# Altium PCB LaunchyRIO-NoPour.PcbDoc
Units mil, origin at the board's own origin, x right, y up, seen from the top; angles counter-clockwise.
Board outline 3400 x 3170 mil, 4 copper layers (Top, GND, 3V3, Bottom), stack 33.234 mil thick; 82 components, 98 nets, 408 pads, 108 vias.
Unrouted connection lines stored in the file: 58.
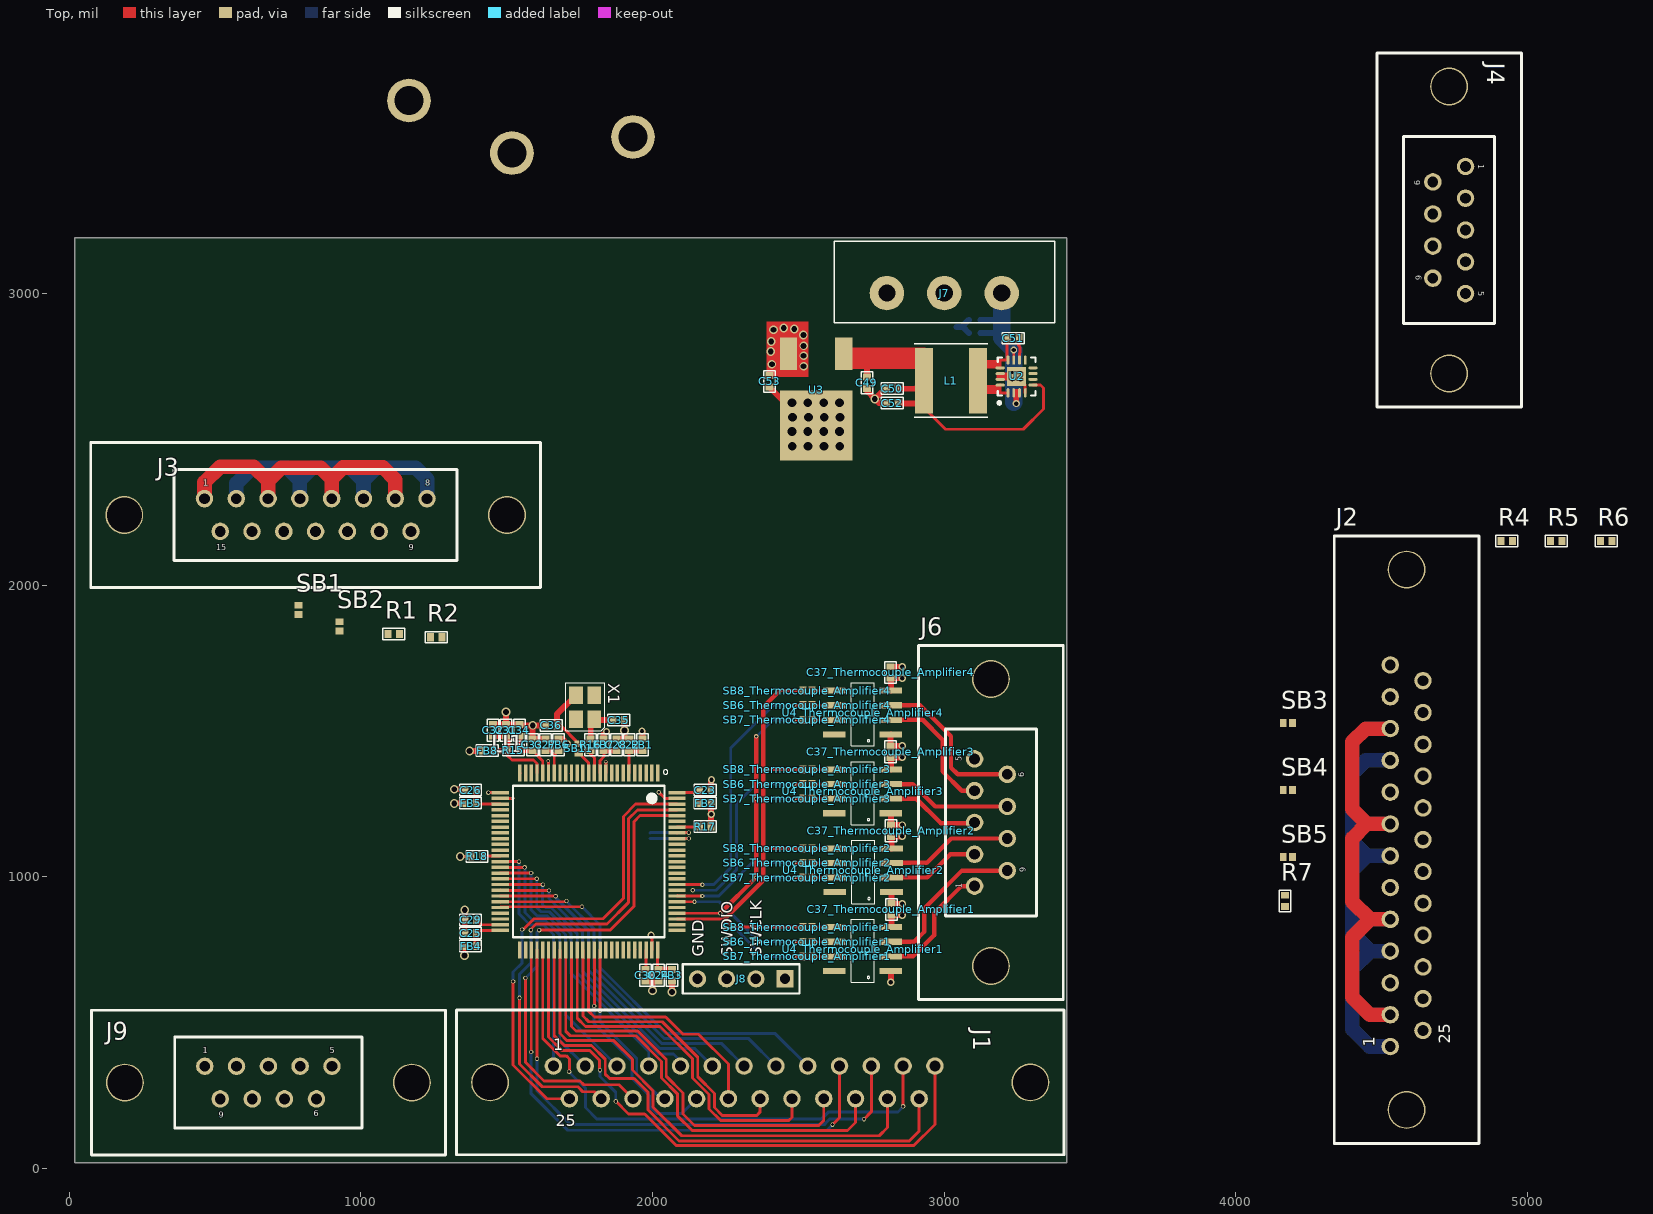
[diagram p0: Top view]
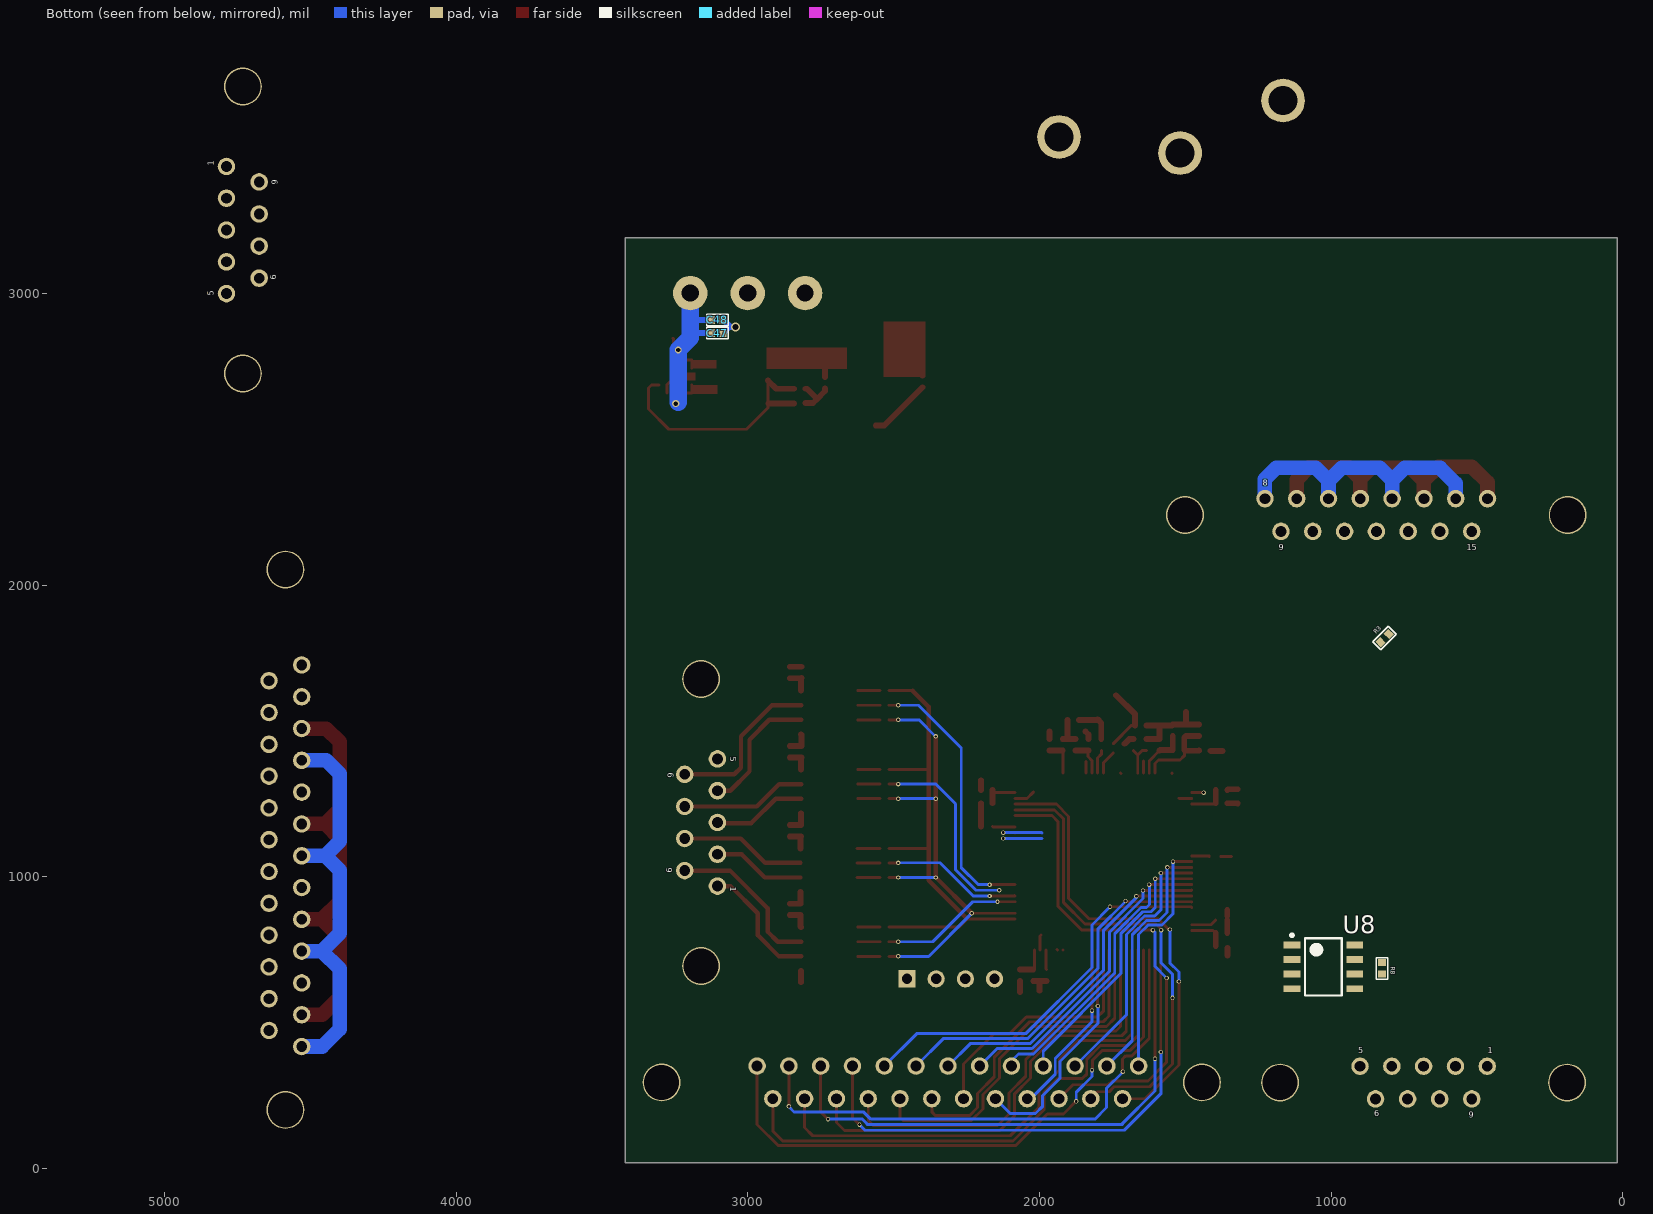
[diagram p1: Bottom view, seen from below]
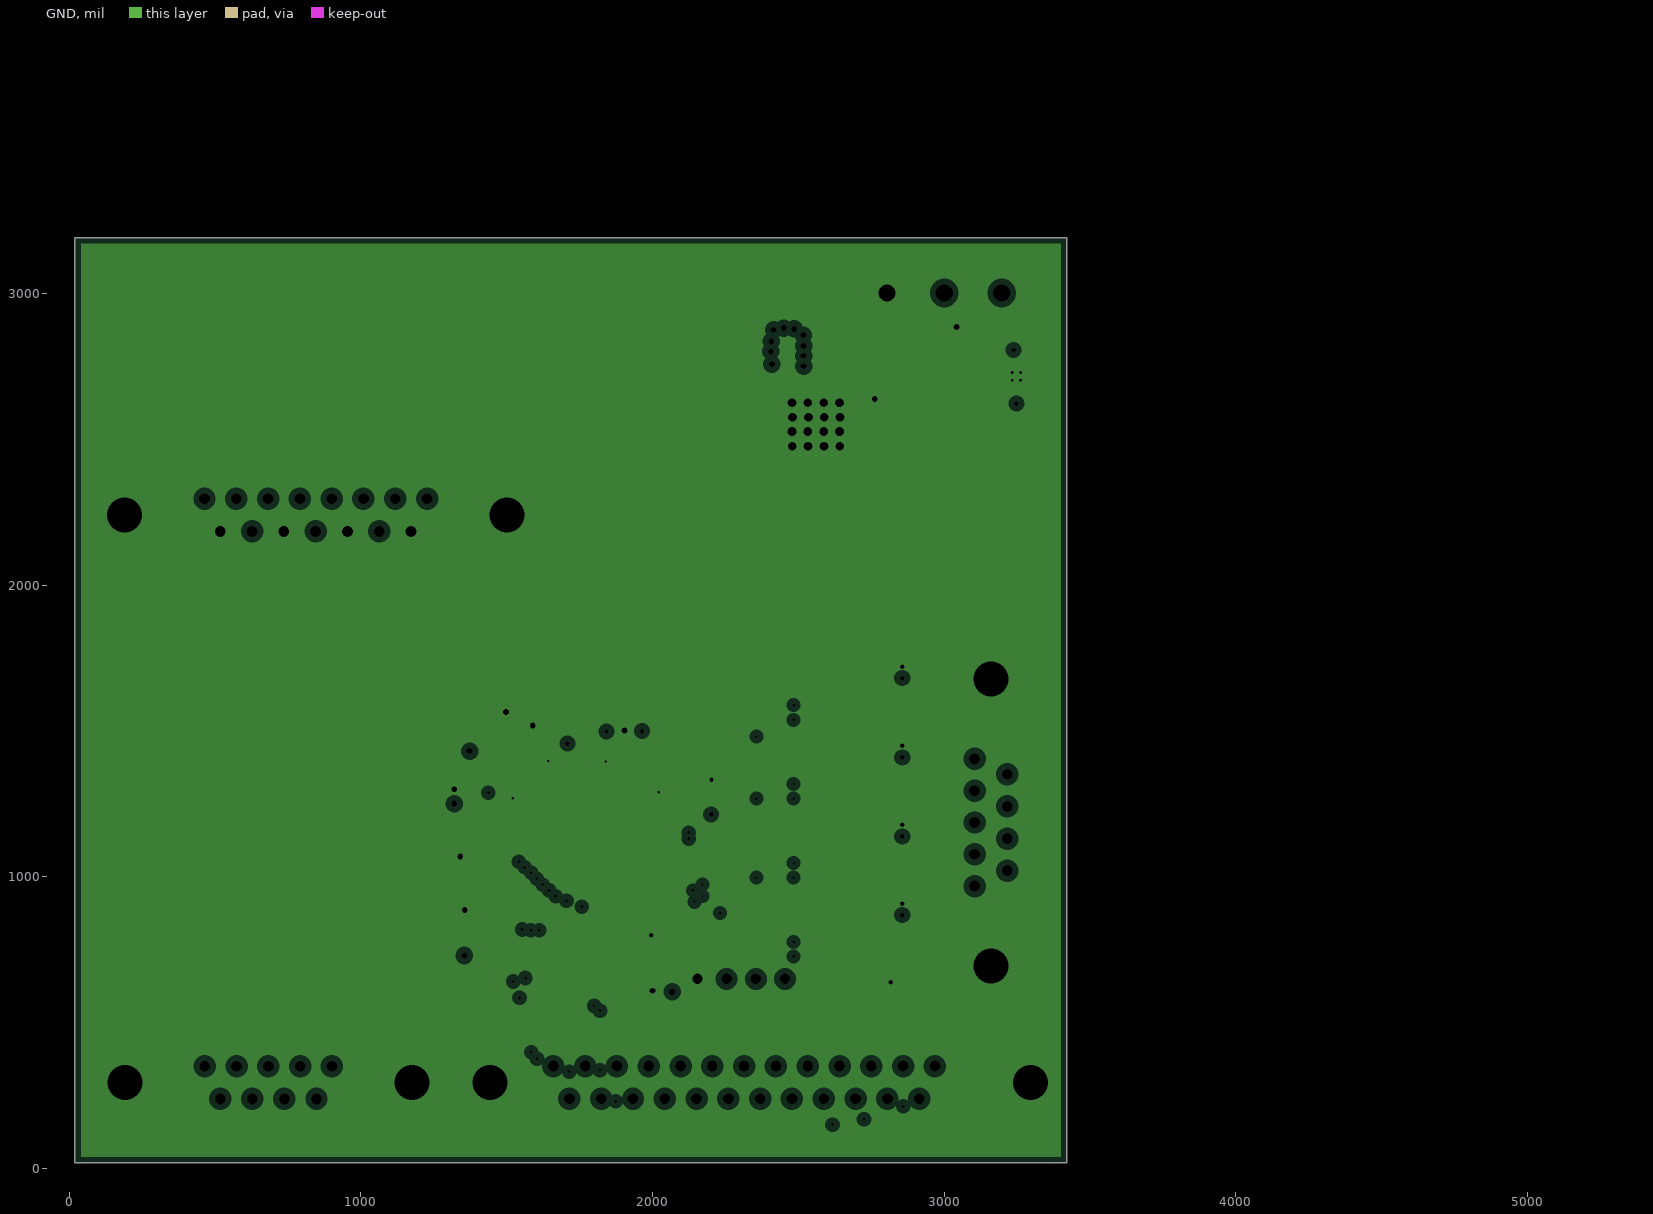
[diagram p2: GND, clearances drawn from the general rule]
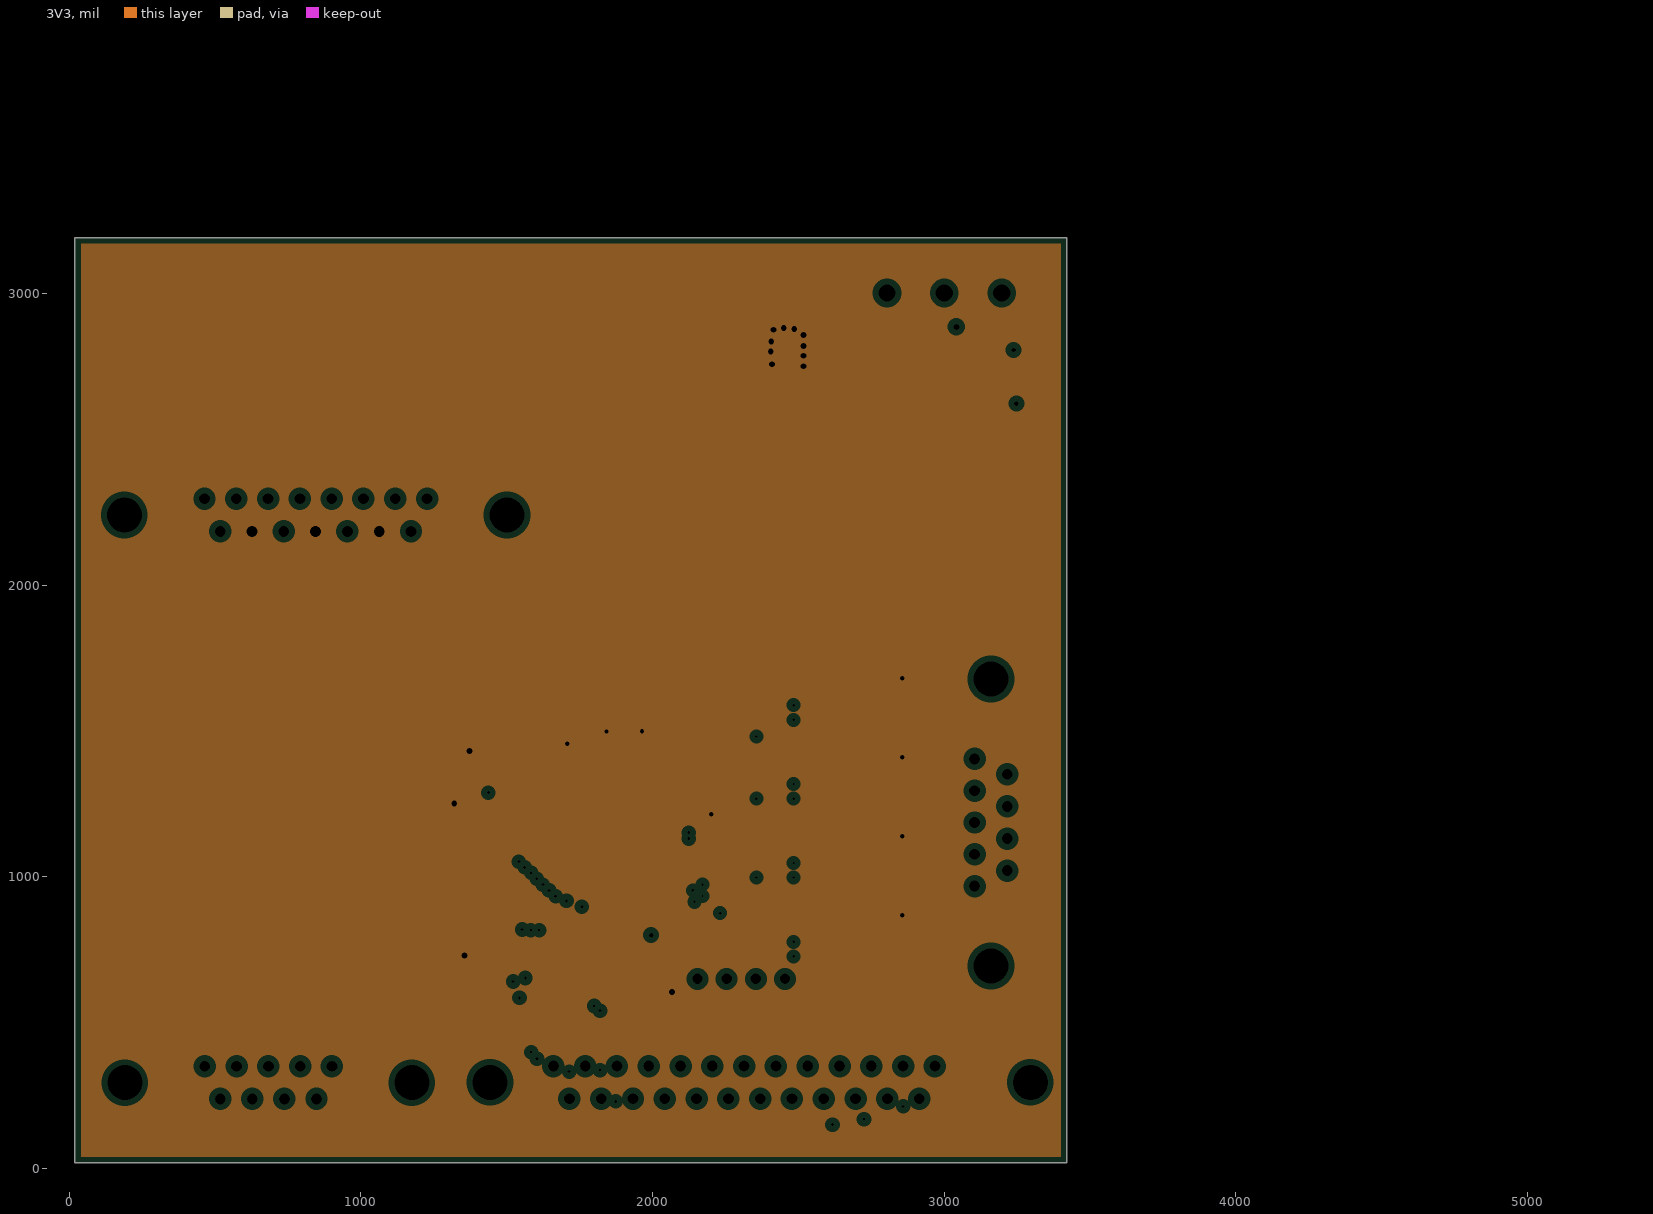
[diagram p3: 3V3, clearances drawn from the general rule]

## Layer stack, top to bottom
Top Solder: solder mask 0.4, Solder Resist, Dk 3.5
Top: signal copper 1.4
Dielectric 1: core 12.6, FR-4, Dk 4.8
GND: plane copper 1.417, net GND
Dielectric 3: prepreg 5, Dk 4.2
3V3: plane copper 1.417, net 3V3
Dielectric 4: core 10, Dk 4.2
Bottom: signal copper 1.4
Bottom Solder: solder mask 0.4, Solder Resist, Dk 3.5

## Board outline
20,20 3420,20 3420,3190 20,3190

## Design rules (kind name [scope] priority, off if disabled: settings)
Clearance [All] p1: gap=5 ignorepadtopadclearanceinfootprint=FALSE
ComponentClearance [All] p1: gap=0 collisioncheckmode=3 verticalgap=0 showdistances=FALSE
HoleSize [All] p1: absolutevalues=TRUE maxlimit=100 minlimit=4 maxpercent=80.000 minpercent=20.000
PlaneClearance [All] p1: clearance=20
PlaneConnect [All] p1: planeconnectstyle=Relief reliefexpansion=20 reliefentries=4 reliefconductorwidth=10 reliefairgap=10
PolygonConnect [All] p1: connectstyle=Relief reliefconductorwidth=10 reliefentries=4 polygonreliefangle="90 Angle" airgapwidth=10
RoutingVias [All] p1: holewidth=10 width=15 viastyle="Through Hole" minholewidth=8 minwidth=8 maxholewidth=50 maxwidth=50
SilkToSilkClearance [All] p1: silktosilkclearance=1
SolderMaskExpansion [All] p1: expansion=5
Width [All] p1: maxlimit=100 minlimit=5 preferedwidth=10
25 further rules are at their usual default settings.

## Classes and differential pairs
net class SS[1..4]: SS1 SS2 SS3 SS4
channel class Thermocouple_Amplifier: Thermocouple_Amplifier1 Thermocouple_Amplifier2 Thermocouple_Amplifier3 Thermocouple_Amplifier4
net class TC_CS[1..4]: TC_CS1 TC_CS2 TC_CS3 TC_CS4
net class T-[1..4]: T-1 T-2 T-3 T-4
net class T+[1..4]: T+1 T+2 T+3 T+4
component class Thermocouple_Amplifier4: C37_Thermocouple_Amplifier4 SB6_Thermocouple_Amplifier4 SB7_Thermocouple_Amplifier4 SB8_Thermocouple_Amplifier4 U4_Thermocouple_Amplifier4
component class Thermocouple_Amplifier3: C37_Thermocouple_Amplifier3 SB6_Thermocouple_Amplifier3 SB7_Thermocouple_Amplifier3 SB8_Thermocouple_Amplifier3 U4_Thermocouple_Amplifier3
component class Thermocouple_Amplifier2: C37_Thermocouple_Amplifier2 SB6_Thermocouple_Amplifier2 SB7_Thermocouple_Amplifier2 SB8_Thermocouple_Amplifier2 U4_Thermocouple_Amplifier2
component class Thermocouple_Amplifier1: C37_Thermocouple_Amplifier1 SB6_Thermocouple_Amplifier1 SB7_Thermocouple_Amplifier1 SB8_Thermocouple_Amplifier1 U4_Thermocouple_Amplifier1
net class GPIO: "GPIO 38" "GPIO 39" "GPIO 40" "GPIO 41" "GPIO 42" "GPIO 43" "GPIO 44" "GPIO 45" "GPIO 46" "GPIO 53" "GPIO 54" "GPIO 55" "GPIO 56" "GPIO 57" "GPIO 58" "GPIO 59" "GPIO 60" "GPIO 61" "GPIO 62" "GPIO 63" "GPIO 64" "GPIO 65" "GPIO 96" "GPIO 97" "GPIO 98"
component class Thermocouples: J6
component class SWD-USB: J8
component class SPI_Breakout: J2 R4 R5 R6 R7 SB3 SB4 SB5
component class Power: C22 C23 C24 C25 C26 C27 C28 C29 C30 C31 C32 C33 C34 C35 C36 C47 C48 C49 C50 C51 C52 C53 FB1 FB2 FB3 FB4 FB5 FB6 FB7 FB8 J7 L1 R15 R16 R17 R18 SB11 U2 U3 X1
component class MCU: U1
component class I2C_Breakout: J3 R1 R2 R3 SB1 SB2
component class GPIO_Breakout: J1
component class CAN_Breakout: J9 R8 U8
component class ADC_GPIO_Breakout: J4

## Components (designator, comment, footprint, x,y, rotation, side; value= is the part's Value field where it differs from the comment)
C22 "" 0402 1920.15,1452.06 r270 top value=1uF
C23 "" 0402 2181.15,1297.06 r180 top value=100nF
C24 "" 0402 2021.15,662.06 r90 top value=100nF
C25 "" 0402 1376.15,807.06 r0 top value=100nF
C26 "" 0402 1376.15,1297.06 r0 top value=100nF
C27 "" 0402 1633.15,1452.06 r270 top value=100nF
C28 "" 0402 1876,1452 r270 top value=100nF
C29 "" 0402 1376.15,852.06 r0 top value=2.2uF
C30 "" 0402 1976.15,662.06 r90 top value=2.2uF
C31 "" 0402 1498.15,1502.06 r270 top value=100nF
C32 "" 0402 1453.15,1502.06 r270 top value=1uF
C33 "" 0402 1588.15,1452.06 r90 top value=100nF
C34 "" 0402 1543.15,1502.06 r90 top value=1uF
C35 "" 0402 1884,1537 r180 top value=30pF
C36 "" 0402 1652.31,1519 r0 top value=30pF
C37_Thermocouple_Amplifier1 "Cap" 0402 2819,888 r270 top value=100nF (schematic designator C37)
C37_Thermocouple_Amplifier2 "Cap" 0402 2818,1158 r270 top value=100nF (schematic designator C37)
C37_Thermocouple_Amplifier3 "Cap" 0402 2816,1429 r270 top value=100nF (schematic designator C37)
C37_Thermocouple_Amplifier4 "Cap" 0402 2816,1700.32 r270 top value=100nF (schematic designator C37)
C47 "Cap" 0402 3104,2864 r0 bottom value=10uF
C48 "Cap" 0402 3104,2909 r0 bottom value=0.1uF
C49 "Cap" 0402 2735,2694 r270 top value=22uF
C50 "Cap" 0402 2822,2673 r180 top value=22uF
C51 "Cap" 0402 3237,2846 r0 top value=22nF
C52 "Cap" 0402 2822,2624 r180 top value=0.33uF
C53 "Cap" 0402 2401,2698 r270 top value=10uF
FB1 "Ferrite Bead" 0402 1965.15,1452.06 r90 top
FB2 "Ferrite Bead" 0402 2181.15,1252.06 r0 top
FB3 "Ferrite Bead" 0402 2066.15,662.06 r270 top
FB4 "Ferrite Bead" 0402 1376.15,762.06 r180 top
FB5 "Ferrite Bead" 0402 1376.15,1252.06 r180 top
FB6 "Ferrite Bead" 0402 1678.15,1452.06 r90 top
FB7 "Ferrite Bead" 0402 1832,1452 r90 top
FB8 "Ferrite Bead" 0402 1433.15,1432.06 r180 top
J1 "25-Position Connector" "25-POS D-SUB" 2369,295 r0 top
J2 "25-Position Connector" "25-POS D-SUB" 4585,1127 r90 top
J3 "772-E15-213R001" "15-Pos D-Sub" 845,2240 r0 top
J4 "9 Pin Connector" "9-Pos D-Sub" 4731,3217 r270 top
J6 "9 Pin Connector" "9-Pos D-Sub" 3160,1186 r90 top
J7 "WPJ 3-Pos Power Connector" WPJ-3Pos 3378.1,2898.64 r180 top
J8 "Header 4" HDR1X4 2454,650 r180 top
J9 "9 Pin Connector" "9-Pos D-Sub" 683,294.33 r0 top
L1 "Inductor" Inductor 3023,2701 r180 top value=4.7uH
R1 "Res1" 0402 1113.31,1832 r0 top value=4.7K
R2 "Res1" 0402 1258,1821 r0 top value=4.7K
R3 "Res1" 0402 817,1818 r135 bottom value=22
R4 "Res1" 0402 4928,2151 r0 top value=4.7K
R5 "Res1" 0402 5098,2151 r0 top value=4.7K
R6 "Res1" 0402 5269,2151 r0 top value=4.7K
R7 "Res1" 0402 4168,917 r90 top value=22
R8 "Res1" 0402 825,685.69 r270 bottom value=120
R15 "Res1" 0402 1523.15,1434.34 r180 top value=47
R16 "Res1" 0402 1788,1452 r270 top value=60
R17 "Res1" 0402 2181.15,1172.06 r180 top value=10k
R18 "Res1" 0402 1398.31,1070 r0 top value=10k
SB1 "Solder Bridge" SB-2pos 787,1919 r90 top
SB2 "Solder Bridge" SB-2pos 927,1862.19 r90 top
SB3 "Solder Bridge" SB-2pos 4174,1527 r180 top
SB4 "Solder Bridge" SB-2pos 4174,1297 r180 top
SB5 "Solder Bridge" SB-2pos 4174,1067 r180 top
SB6_Thermocouple_Amplifier1 "Solder Bridge" SB-2pos 2527.13,777 r180 top (schematic designator SB6)
SB6_Thermocouple_Amplifier2 "Solder Bridge" SB-2pos 2527.13,1047.33 r180 top (schematic designator SB6)
SB6_Thermocouple_Amplifier3 "Solder Bridge" SB-2pos 2527.13,1317.67 r180 top (schematic designator SB6)
SB6_Thermocouple_Amplifier4 "Solder Bridge" SB-2pos 2527.13,1588 r180 top (schematic designator SB6)
SB7_Thermocouple_Amplifier1 "Solder Bridge" SB-2pos 2527.13,727 r180 top (schematic designator SB7)
SB7_Thermocouple_Amplifier2 "Solder Bridge" SB-2pos 2527.13,997.33 r180 top (schematic designator SB7)
SB7_Thermocouple_Amplifier3 "Solder Bridge" SB-2pos 2527.13,1267.67 r180 top (schematic designator SB7)
SB7_Thermocouple_Amplifier4 "Solder Bridge" SB-2pos 2527.13,1538 r180 top (schematic designator SB7)
SB8_Thermocouple_Amplifier1 "Solder Bridge" SB-2pos 2527.13,827 r180 top (schematic designator SB8)
SB8_Thermocouple_Amplifier2 "Solder Bridge" SB-2pos 2527.13,1097.33 r180 top (schematic designator SB8)
SB8_Thermocouple_Amplifier3 "Solder Bridge" SB-2pos 2527.13,1367.67 r180 top (schematic designator SB8)
SB8_Thermocouple_Amplifier4 "Solder Bridge" SB-2pos 2527.13,1638 r180 top (schematic designator SB8)
SB11 "Jumper" SB-2pos 1747,1444.19 r90 top
U1 "STM32F407xx" LQFP100 1781.15,1052.06 r270 top
U2 "5V Switching Regulator" VQFN16 3248,2715 r90 top
U3 "3.3V Linear Regulator" DPAK 2685.02,2848.18 r180 top
U4_Thermocouple_Amplifier1 "Thermocouple to Digital Converter" "8-SOIC MAXIM" 2720,677 r180 top (schematic designator U4)
U4_Thermocouple_Amplifier2 "Thermocouple to Digital Converter" "8-SOIC MAXIM" 2721.95,947.33 r180 top (schematic designator U4)
U4_Thermocouple_Amplifier3 "Thermocouple to Digital Converter" "8-SOIC MAXIM" 2720,1217.67 r180 top (schematic designator U4)
U4_Thermocouple_Amplifier4 "Thermocouple to Digital Converter" "8-SOIC MAXIM" 2720,1488 r180 top (schematic designator U4)
U8 "CAN Bus Transceiver" 8SOIC-CAN-TRANSCEIVER 1027,691 r180 bottom
X1 "XTAL" "4SMD 25MHZ CRYSTAL" 1769,1583 r90 top

## Footprints (in the part's own frame and the unit in brackets; to place one, negate y for a bottom-side part, rotate by r counter-clockwise, add the part's x,y. Pads: shape width x height; smd on the part's side, far side on the other; paste and mask are expansions set on the pad)
"4SMD 25MHZ CRYSTAL" [mm]
  rect 1.5x1.2 smd: 1(-1.1,-0.8) 2(1,0.8) None(-1.1,0.8) None(1,-0.8)
  silkscreen extent -2.1,-1.7 2.1,1.7
"8-SOIC MAXIM" [mm] "Thermocouple Amplifier, Maxim Land Pattern 90-0096"
  rect 1.98x0.53 smd: 1(-2.465,0) 2(-2.465,-1.27) 3(-2.465,-2.54) 4(-2.465,-3.81) 5(2.465,-3.81) 6(2.465,-2.54) 7(2.465,-1.27) 8(2.465,0)
  silkscreen extent -1,-4.5 1,1
8SOIC-CAN-TRANSCEIVER [mm] "SOIC, 8-Leads, Body 4.90x3.90mm, Pitch 1.27mm, IPC Medium Density"
  rect 1.45x0.6 smd: 1(-2.725,1.905) 2(-2.725,0.635) 3(-2.725,-0.635) 4(-2.725,-1.905) 5(2.725,-1.905) 6(2.725,-0.635) 7(2.725,0.635) 8(2.725,1.905)
  silkscreen extent -2.85,-2.5 1.6,2.88, body extent -2,-2.5 2,2.5, height 1.75
"9-Pos D-Sub" [mil] "9-pos connector"
  round 60 hole 37: 1(-218,56) 2(-109,56) 3(0,56) 4(109,56) 5(218,56) 6(165,-56) 7(55,-56) 8(-55,-56) 9(-165,-56)
  round 130 hole 120 unplated: SHIELD(-492,0) SHIELD(492,0)
  silkscreen extent -607,-248 607,248
"15-Pos D-Sub" [mil] "15-pos connector"
  round 60 hole 37: 1(-381,56) 2(-272,56) 3(-163,56) 4(-54,56) 5(55,56) 6(164,56) 7(273,56) 8(382,56) 9(327,-56) 10(218,-56) 11(109,-56) 12(0,-56) 13(-109,-56) 14(-218,-56) 15(-327,-56)
  round 130 hole 120 unplated: SHIELD(-656,0) SHIELD(656,0)
  silkscreen extent -771,-248 771,248
"25-POS D-SUB" [mil]
  round 60 hole 37: 1(-709,56) 2(-600,56) 3(-491,56) 4(-382,56) 5(-273,56) 6(-164,56) 8(54,56) 9(163,56) 10(272,56) 11(381,56) 12(490,56) 13(599,56) 14(545,-56) 15(436,-56) 16(327,-56) 17(218,-56) 18(109,-56) 19(0,-56) 20(-109,-56) 21(-218,-56) 22(-327,-56) 23(-436,-56) 24(-545,-56) 25(-654,-56)
  round 60 hole 37 paste+0: 7(-55.33,56)
  round 130 hole 120 unplated: SHIELD(-926,0) SHIELD(926,0)
  silkscreen extent -1042,-248 1042,248
0402 [mm]
  rect 0.6x0.7 smd: 1(-0.5,0) 2(0.5,0)
  silkscreen extent -0.95,-0.5 0.95,0.5
DPAK [mm]
  rect 1.5x2.8 smd: 1(0.75,1.4) 2(5.55,1.4)
  rect 6.3x6.1 smd: 3(3.15,7.65)
HDR1X4 [mm] "Connector; Header; 4 Position"
  rect 1.5x1.5 hole 0.9: 1(0,0)
  round 1.5 hole 0.9: 2(2.54,0) 3(5.08,0) 4(7.62,0)
  silkscreen extent -1.27,-1.27 8.89,1.27
Inductor [mm] "Non-Standard package, DigiKey PN: https://www.digikey.com/product-detail/en/taiyo-yuden/NR6028T4R7M/587-2100-1-ND/1866240"
  rect 1.6x5.7 smd: 1(-2.35,0) 2(2.35,0)
  silkscreen extent -3.2,-3.2 3.2,3.2
LQFP100 [mm]
  rect 1.5x0.3 smd: 1(-7.7,6) 2(-7.7,5.5) 3(-7.7,5) 4(-7.7,4.5) 5(-7.7,4) 6(-7.7,3.5) 7(-7.7,3) 8(-7.7,2.5) 9(-7.7,2) 10(-7.7,1.5) 11(-7.7,1) 12(-7.7,0.5) 13(-7.7,0) 14(-7.7,-0.5) 15(-7.7,-1) 16(-7.7,-1.5) 17(-7.7,-2) 18(-7.7,-2.5) 19(-7.7,-3) 20(-7.7,-3.5) 21(-7.7,-4) 22(-7.7,-4.5) 23(-7.7,-5) 24(-7.7,-5.5) 25(-7.7,-6) 51(7.7,-6) 52(7.7,-5.5) 53(7.7,-5) 54(7.7,-4.5) 55(7.7,-4) 56(7.7,-3.5) 57(7.7,-3) 58(7.7,-2.5) 59(7.7,-2) 60(7.7,-1.5) 61(7.7,-1) 62(7.7,-0.5) 63(7.7,0) 64(7.7,0.5) 65(7.7,1) 66(7.7,1.5) 67(7.7,2) 68(7.7,2.5) 69(7.7,3) 70(7.7,3.5) 71(7.7,4) 72(7.7,4.5) 73(7.7,5) 74(7.7,5.5) 75(7.7,6)
  rect 0.3x1.5 smd: 26(-6,-7.7) 27(-5.5,-7.7) 28(-5,-7.7) 29(-4.5,-7.7) 30(-4,-7.7) 31(-3.5,-7.7) 32(-3,-7.7) 33(-2.5,-7.7) 34(-2,-7.7) 35(-1.5,-7.7) 36(-1,-7.7) 37(-0.5,-7.7) 38(0,-7.7) 39(0.5,-7.7) 40(1,-7.7) 41(1.5,-7.7) 42(2,-7.7) 43(2.5,-7.7) 44(3,-7.7) 45(3.5,-7.7) 46(4,-7.7) 47(4.5,-7.7) 48(5,-7.7) 49(5.5,-7.7) 50(6,-7.7) 76(6,7.7) 77(5.5,7.7) 78(5,7.7) 79(4.5,7.7) 80(4,7.7) 81(3.5,7.7) 82(3,7.7) 83(2.5,7.7) 84(2,7.7) 85(1.5,7.7) 86(1,7.7) 87(0.5,7.7) 88(0,7.7) 89(-0.5,7.7) 90(-1,7.7) 91(-1.5,7.7) 92(-2,7.7) 93(-2.5,7.7) 94(-3,7.7) 95(-3.5,7.7) 96(-4,7.7) 97(-4.5,7.7) 98(-5,7.7) 99(-5.5,7.7) 100(-6,7.7)
  silkscreen extent -8,-6.6 6.6,6.9
SB-2pos [mm]
  rect 0.6x0.7 smd: 1(-0.5,0) 2(0.3,0)
VQFN16 [mm] "QFN, 16-Leads, Body 3.00x3.00mm, Pitch 0.50mm, Thermal Pad 1.68x1.68mm, IPC Medium Density"
  oval 0.8x0.25 smd: 1(-1.425,0.75) 2(-1.425,0.25) 3(-1.425,-0.25) 4(-1.425,-0.75) 9(1.425,-0.75) 10(1.425,-0.25) 11(1.425,0.25) 12(1.425,0.75)
  oval 0.25x0.8 smd: 5(-0.75,-1.425) 6(-0.25,-1.425) 7(0.25,-1.425) 8(0.75,-1.425) 13(0.75,1.425) 14(0.25,1.425) 15(-0.25,1.425) 16(-0.75,1.425)
  rect 1.68x1.68 smd: 17(0,0)
  silkscreen extent -2.42,-1.65 1.65,1.65, body extent -1.5,-1.5 1.5,1.5, height 1
WPJ-3Pos [mm] "3 Position Power Connector. DigiKey PN: 455-2448-ND"
  round 3 hole 1.5 unplated: 1(4.6,-2.6) 2(9.6,-2.6) 3(14.6,-2.6)
  silkscreen extent 0,-7.1 19.2,0

## Part data
C22 C23 C24 C25 C26 C27 C28 C29 C30 C31 C32 C33 C34 C35 C36: library part Cap, "Capacitor"
C37_Thermocouple_Amplifier1 C37_Thermocouple_Amplifier2 C37_Thermocouple_Amplifier3 C37_Thermocouple_Amplifier4 C47 C48 C49 C50 C51 C52 C53: "Capacitor"
  C47 C48: LatestRevisionDate=17-Jul-2002, LatestRevisionNote="Re-released for DXP Platform.", PackageDescription="Radial Cap, Thru-Hole; 2 Leads; 0.3 in Pin Spacing", PackageReference=RAD-0.3, Published=8-Jun-2000, Publisher="Altium Limited"
J1 J2: DigiKey Part Number=NOR1066-ND, Manufacturer Part Number=772-E25-213R051
J3: library part "15-Position Connector", "15-Position Connector", Current Rating=5A, DigiKey Part Number=NOR1010-ND, Material Flammability Rating="UL94 V-0", Operating Temperature="-50°C ~ 100°C", Connector Type="Receptacle, Female Sockets", Contact Finish=Gold, Contact Type=Signal, Ingress Protection="IP67 - Dust Tight, Waterproof", Manufacturer Part Number=772-E15-213R001, Mounting Type="Panel Mount, Through Hole", Number of Positions=15, Shell Material, Finish="Steel, Nickel Plated"
J4 J6 J9: library part "9-Position Connector", "9-Position Connector", Unknown parameter=772-E09-213R011
J7: Manufacturer PN=B03B-WPJSS-1(LF)(SN), DigiKey PN=455-2448-ND
J8: "Header, 4-Pin", LatestRevisionDate=17-Jul-2002, LatestRevisionNote="Re-released for DXP Platform.", Publisher="Altium Limited"
R1 R2 R3 R4 R5 R6 R7 R8 R15 R16 R17 R18: "Resistor"
SB1 SB2 SB3 SB4 SB5 SB6_Thermocouple_Amplifier1 SB6_Thermocouple_Amplifier2 SB6_Thermocouple_Amplifier3 SB6_Thermocouple_Amplifier4 SB7_Thermocouple_Amplifier1 SB7_Thermocouple_Amplifier2 SB7_Thermocouple_Amplifier3 SB7_Thermocouple_Amplifier4 SB8_Thermocouple_Amplifier1 SB8_Thermocouple_Amplifier2 SB8_Thermocouple_Amplifier3 SB8_Thermocouple_Amplifier4: library part Jumper, "Jumper Wire"
SB11: "Jumper Wire"
U4_Thermocouple_Amplifier1 U4_Thermocouple_Amplifier2 U4_Thermocouple_Amplifier3 U4_Thermocouple_Amplifier4: library part MAX31855x, Manufacturer PN=MAX31855EASA+, DigiKey PN=MAX31855EASA+-ND, Thermocouple Type=E
U8: library part SN65HVD232DR, DigiKey Part Number=296-26344-1-ND, Manufacturer="Texas Instruments", Operating Temperature="-40 ~ 85 C", Supply Voltage="3V ~ 3.6V", Manufacturer Part Number=SN65HVD232DR, Max Data Rate=1Mbps
X1: "Crystal Oscillator", DigiKey Part Number=FL2500316ZTR-ND, Frequency=25MHz, Mnf Part No=FL2500316Z
L1: DigiKey PN=587-2100-1-ND
U2: DigiKey PN=TS30011-M050QFNRCT-ND
U3: DigiKey PN=497-1496-1-ND

## Free pads (board coordinates)
  round 150 hole 100 unplated: MOUNT(1165,3661) MOUNT(1518,3481) MOUNT(1933,3536)

## Via types
v1: diameter 15, hole 10, Top to Bottom, 28 vias
v2: diameter 15, hole 8, Top to Bottom, 16 vias
v3: diameter 40, hole 30, Top to GND, 16 vias
v4: diameter 30, hole 20, Top to 3V3, 14 vias
v5: diameter 25, hole 15, Top to 3V3, 9 vias
v6: diameter 30, hole 20, Top to GND, 8 vias
v7: diameter 25, hole 15, Top to GND, 6 vias
v8: diameter 15, hole 10, Top to GND, 4 vias
v9: diameter 12, hole 8, Top to GND, 3 vias
v10: diameter 15, hole 8, Top to GND, 1 vias
v11: diameter 30, hole 20, GND to Bottom, 1 vias
v12: diameter 23, hole 15, Top to Bottom, 1 vias
v13: diameter 25, hole 15, Top to Bottom, 1 vias

## Nets (pads, with @x,y where several pads share a name; then routed paths per layer and width w, separated by ;. In a path a pad name is that pad's centre, name@x,y a point inside that pad or via, vN(x,y) a via of type N, cw(c..) or ccw(c..) an arc to the next point about the centre after c; other vN are vias at no path point)
3V3: C37_Thermocouple_Amplifier1.2 C37_Thermocouple_Amplifier2.2 C37_Thermocouple_Amplifier3.2 C37_Thermocouple_Amplifier4.2 C53.1 FB1.2 FB2.2 FB3.2 FB4.2 FB5.2 FB6.2 FB7.2 FB8.2 J2.14 J2.17 J2.20 J2.23 J3.10 J3.12 J3.14 R1.2 R2.2 R4.1 R5.2 R6.1 R17.1 U3.2 U4_Thermocouple_Amplifier1.4 U4_Thermocouple_Amplifier2.4 U4_Thermocouple_Amplifier3.4 U4_Thermocouple_Amplifier4.4 U8.3 | length 741.3
  Top w10: v5(1964,1499) v5@1965.15,1497.85
  Top w20: v4(1320,1251) 1321.06,1252.06 FB5.2 ; v4(1355.11,730) FB4.2@1355.11,755.63 ; v4(1373,1431) 1412.41,1431 FB8.2 ; FB6.2 1692.26,1471.74 v5(1708,1456) ; FB7.2 1832,1488 v5(1842,1498) ; FB1.2 v5@1965.15,1497.85 ; FB3.2 2067,641.52 v4(2067,605) ; R17.1 FB2.2 ; C53.1 2401,2727.55 U3.2 ; C37_Thermocouple_Amplifier3.2 C37_Thermocouple_Amplifier3.2@2817.05,1408.27 ; C37_Thermocouple_Amplifier4.2@2816,1681.31 C37_Thermocouple_Amplifier4.2@2816.68,1680.63 ; U4_Thermocouple_Amplifier1.4 2819,828.95 C37_Thermocouple_Amplifier1.2 v5(2856,868.31) ; U4_Thermocouple_Amplifier3.4 C37_Thermocouple_Amplifier3.2@2817.05,1408.27 ; U4_Thermocouple_Amplifier4.4 2817.05,1680.27 C37_Thermocouple_Amplifier4.2@2816.68,1680.63 ; U4_Thermocouple_Amplifier2.4 2819,1137.31 C37_Thermocouple_Amplifier2.2 v5(2856,1138.31) ; v5(2856,1409.31) 2818.09,1409.31 C37_Thermocouple_Amplifier3.2@2817.05,1408.27 ; v5(2856,1680.63) C37_Thermocouple_Amplifier4.2@2816.68,1680.63
  other v4: 2518,2750 2409,2757 2518,2786 2405,2801 2518,2820 2407,2835 2517,2857 2415,2875 2486,2878 2450,2881
  other v5: 2201,1214
5V: C49.1 C50.1 C52.1 L1.2 U2.5 U3.1 | length 918.3
  Top w10: L1.2 2930.48,2607.52 3004,2534 3271,2534 3340,2603 3340,2675 3329.53,2685.47 U2.5
  Top w20: C49.1 2735,2770 ; C52.1@2841.68,2622 L1.2@2929,2622 ; C50.1 2902.48,2673 L1.2
12V: C47.2 C48.2 J7.1 U2.2 U2.3 U2.11 | length 581.4
  Top w10: U2.11 v12(3238.16,2805.84)
  Bottom w20: C47.2 3180,2864 3197,2847 ; C48.2 3195,2909 3197,2907
  Bottom w60: J7.1 3197,2907 3197,2847 v12(3238.16,2805.84) v13@3238.16,2625.84
  other v13: 3247,2622
CANH: J9.7 R8.1 U8.7 | length 12.3
  Bottom w20: J9.7@729.33,229.67 J9.7
CANL: J9.2 R8.2 U8.6
GND: C22.1 C23.1 C24.1 C25.1 C26.1 C27.1 C28.1 C29.1 C30.1 C31.1 C32.1 C33.2 C34.2 C35.1 C36.1 C37_Thermocouple_Amplifier1.1 C37_Thermocouple_Amplifier2.1 C37_Thermocouple_Amplifier3.1 C37_Thermocouple_Amplifier4.1 C47.1 C48.1 C49.2 C50.2 C52.2 C53.2 J1.SHIELD J2.13 J2.15 J2.18 J2.21 J2.24 J3.9 J3.11 J3.13 J3.15 J3.SHIELD J4.SHIELD J6.SHIELD J7.3 J8.4 J9.SHIELD pad.MOUNT R18.1 U1.10 U1.20 U1.27 U1.74 U1.99 U2.4 U2.14 U2.15 U2.17 U3.3 U4_Thermocouple_Amplifier1.1 U4_Thermocouple_Amplifier2.1 U4_Thermocouple_Amplifier3.1 U4_Thermocouple_Amplifier4.1 U8.2 | length 1763.9
  Top w10: v6(1341,1069) 1377.63,1069 R18.1 ; U1.27 1520.59,1268.59 v9(1521,1269) ; v9(1643,1397) 1643.35,1396.65 U1.20 ; v9(1840,1395) 1840.2,1394.8 U1.10 ; v5(1995,800) 1997.68,797.32 U1.74 ; v10(2021,1290) 2042.41,1268.59 U1.99 ; v7@2200.83,1330.83 v7(2202,1332) ; U2.17 v8(3261,2702) 3277.53,2685.47 U2.4
  Top w20: v6(1320,1300) 1353.52,1300 C26.1 ; C29.1@1356,851.59 1356.46,851.13 C25.1 ; C29.1@1356,865 v6(1356,886) ; C32.1 C31.1 ; v6@1498.15,1564.85 C31.1 ; C27.1@1632.63,1472.26 C27.1 C33.2 1588.15,1517.89 v6(1589.26,1519) ; C36.1 v6(1589.26,1519) ; C28.1 1897,1471.68 ; C35.1 v6(1903.69,1501) 1903.69,1478.37 1897,1471.68 ; C22.1 C22.1 1897,1471.68 ; C30.1 2000,642.37 ; v6(2000,609) 2000,642.37 ; C24.1 2000,642.37 ; C23.1 v7@2200.83,1330.83 ; C53.2 2532.31,2547 2534.33,2547 U3.3 ; C49.2 2735,2665 v6(2762,2638) ; C52.2 2776,2624 v6(2762,2638) ; C50.2 2797,2673 v6(2762,2638) ; C37_Thermocouple_Amplifier4.1 v7(2856,1720) ; v7(2817.05,638.05) U4_Thermocouple_Amplifier1.1 ; U4_Thermocouple_Amplifier3.1 2818,1216.71 C37_Thermocouple_Amplifier2.1 v7(2856,1177.68) ; U4_Thermocouple_Amplifier4.1 2816,1486.95 C37_Thermocouple_Amplifier3.1 v7(2856,1448.68) ; U4_Thermocouple_Amplifier2.1 C37_Thermocouple_Amplifier1.1 v7(2856,907.68) ; C31.1 C34.2 1545.89,1519 v6(1589.26,1519)
  Bottom w20: v11(3042,2885) 3060.32,2885 ; C47.1 3063.32,2885 3060.32,2885 ; C48.1 3060.32,2885
  other v3: 2479,2476 2533.33,2476 2587.67,2476 2642,2476 2478,2526 2532.33,2526 2586.67,2526 2641,2526 2480,2575 2534.33,2575 2588.67,2575 2643,2575 2478,2625 2532.33,2625 2586.67,2625 2641,2625
  other v6: 1498,1565
  other v8: 3233,2702 3233,2729 3262,2729
"GPIO 38": J1.1 U1.38 | length 841.4
  Top w10: U1.38 1523.94,1052.06 1524,1052 v1(1542,1052)
  Bottom w10: v1(1542,1052) 1542,873 1580,835 1627,835 1660,802 J1.1
"GPIO 39": J1.2 U1.39 | length 876.6
  Top w10: U1.39 v1(1561.63,1032.37)
  Bottom w10: v1(1561.63,1032.37) 1562.37,1032.37 1562.37,877.63 1590,850 1633.21,850 1682,801.21 1682,438 J1.2
"GPIO 40": J1.3 U1.40 | length 910.1
  Top w10: U1.40 1583.68,1012.68 v1(1584,1013)
  Bottom w10: v1(1584,1013) 1584,886 1605,865 1639.43,865 1702,802.43 1702,527 J1.3
"GPIO 41": J1.4 U1.41 | length 942.2
  Top w10: U1.41 v1(1603,993)
  Bottom w10: v1(1603,993) 1603,895 1618,880 1645.64,880 1721,804.64 1721,668 1987,402 J1.4
"GPIO 42": J1.5 U1.42 | length 1006.8
  Top w10: U1.42 1478.31,973 1479.31,974 1480.31,973 v1(1624,973)
  Bottom w10: v1(1624,973) 1623,972 1623,905 1633,895 1651.85,895 1742,804.85 1742,670 2020,392 2072,392 2096,368 J1.5
"GPIO 43": J1.6 U1.43 | length 1071.8
  Top w10: U1.43 1478.37,954 1479.37,953 v1(1645,953)
  Bottom w10: v1(1645,953) 1645,925 1760,810 1760,676 2025,411 2145,411 J1.6
"GPIO 44": J1.7 U1.44 | length 1159.7
  Top w10: U1.44 1667.06,933.94 v1(1668,933)
  Bottom w10: v1(1668,933) 1668,927.91 1781,814.91 1781,679 2031,429 2235.67,429 J1.7
"GPIO 45": J1.8 U1.45 | length 1259.1
  Top w10: U1.45@1478.26,914 U1.45 v1@1704,914.26
  Bottom w10: v1(1705,917) 1705,915 1800,820 1800,685 2039,446 2328,446 J1.8
"GPIO 46": J1.9 U1.46 | length 1366.7
  Top w10: U1.46 1480.42,897 v1(1758,897)
  Bottom w10: v1(1758,897) 1820,835 1820,689 2047,462 2421,462 J1.9
"GPIO 53": J1.10 U1.53 | length 1795.8
  Top w10: v1@1584.3,399.7 U1.53 ; v1(2617,150) 2641,174 J1.10
  Bottom w10: v1(1584,399) 1584,256 1709,131 2598,131 v1(2617,150)
"GPIO 54": J1.11 U1.54 | length 1850.3
  Top w10: v1(1604,376) U1.54 ; v1(2725,169) 2750,194 J1.11
  Bottom w10: v1(1604,376) 1604,265 1716,153 ; 1716,150 2591,150 ; 2591,153 2607,169 v1(2725,169)
"GPIO 55": J1.12 U1.55 | length 1877.7
  Top w10: U1.55 1623.67,445.33 1683,386 1704,386 1715,375 v1@1715,333 ; v1(2859,213) J1.12 J1.12@2859,354
  Bottom w10: v1(1714,332) 1714,331 1770,275 1770,209 1810,169 2578,169 2602,193 2841.22,193 v1(2859,213)
"GPIO 56": J1.13 U1.56 | length 2054.9
  Top w10: U1.56 1643.35,450.65 1689,405 1784,405 1818,371 v1@1818,339 ; v1@1874,231 1918,187 1973,187 2082,78 2895,78 2968,151 J1.13
  Bottom w10: v1(1820,337) 1820,315 1874,261 v1(1874,230)
"GPIO 57": J1.14 U1.57 | length 1884.5
  Top w10: U1.57 1663.04,454.96 1697,421 1791,421 1838,374 1838,323 1853,308 1937,308 1985,260 1985,200 2091,94 2880,94 2914,128 J1.14
"GPIO 58": J1.15 U1.58 | length 1719.1
  Top w10: U1.58 1682.72,462.28 1707,438 1867,438 1931,374 1931,337 2002,266 2002,210 2100,112 2777,112 2805,140 J1.15
"GPIO 59": J1.16 U1.59 | length 1583.1
  Top w10: U1.59 1702.41,470.32 1717.72,455 1943,455 2031,367 2031,310 2085,256 2085,181 2136,130 2668,130 2696,158 J1.16
"GPIO 60": J1.17 U1.60 | length 1425.3
  Top w10: U1.60 1722.09,486.91 1738,471 1949,471 2047,373 2047,316 2104,259 2104,187 2144,147 2570,147 2587,164 J1.17
"GPIO 61": J1.18 U1.61 | length 1250.5
  Top w10: U1.61 1741.78,515.22 1770,487 2026,487 2137,376 2137,310 2194,253 2194,204 2233,165 2468,165 2478,175 J1.18
"GPIO 62": J1.19 U1.62 | length 1093.1
  Top w10: U1.62 1761.46,522.54 1781,503 2033,503 2155,381 2155,314 2212,257 2212,209 2240,181 2356,181 2369,194 J1.19
"GPIO 63": J1.20 U1.63 | length 882.8
  Top w10: U1.63 1781.15,538.85 1801,519 2045,519 2104,460 2158,460 2260,358 J1.20
"GPIO 64": J1.21 U1.64 | length 808.7
  Top w10: v1(1800,557) 1801,557 1800.83,557.17 U1.64
  Bottom w10: v1(1800,557) 1800,497 1930,367 1930,309 1989,250 1989,213 2014,188 2100,188 J1.21
"GPIO 65": J1.22 U1.65 | length 609.1
  Top w10: v1(1820,541) 1820.52,541.52 U1.65
  Bottom w10: v1(1820,541) 1820,503 1946,377 1946,323 2030,239 J1.22
"GPIO 96": J1.23 U1.96 | length 1701.1
  Top w10: v1(1564,653) 1564,364 1628,300 1751,300 1764,287 1885,287 J1.23 ; v1(1611,817) 1855,817 1936.62,898.62 1936.62,1188.72 1957.44,1209.54 U1.96
  Bottom w10: v1(1564,653) 1604,693 1604,811 1611,818 v1(1611,817)
"GPIO 97": J1.24 U1.97 | length 1647
  Top w10: v1(1544,585) 1544,358 1622,280 1744,280 1761,263 1800,263 J1.24 ; v1(1583,817) 1583,821 1600,838 1844,838 1917,911 1917,1198 1948.22,1229.22 U1.97
  Bottom w10: v1(1544,585) 1544,666 1583,705 v1(1583,817)
"GPIO 98": J1.25 U1.98 | length 1591.9
  Top w10: v1(1522,641) 1522,355 1638,239 J1.25 ; v1(1553,819) 1557,819 1587.5,849.5 1587.5,849.59 1593.91,856 1830,856 1900,926 1900,1207 1941.91,1248.91 U1.98
  Bottom w10: v1(1522,641) 1522,673 1553,704 v1(1553,819)
MISO: J2.1 J2.4 J2.7 J2.10 R6.2 SB3.2 | length 1419.9
  Bottom w50: J2.1 4459,418 4399,478 4399,684 4460,745 ; J2.4 4460,745 ; J2.7@4529,1072 4449,1072 ; J2.10 4445,1399 4399,1353 4399,1122 4449,1072 ; 4449,1072 4399,1022 4399,806 4460,745
MOSI: J2.2 J2.5 J2.8 J2.11 R5.1 SB4.2 | length 1419.9
  Top w50: J2.2 4459,527 4399,587 4399,793 4460,854 ; J2.5 4460,854 ; J2.8 4449,1181 ; J2.11 4445,1508 4399,1462 4399,1231 4449,1181 ; 4449,1181 4399,1131 4399,915 4460,854
NetC22_2: C22.2 FB1.1 U1.6 | length 120.9
  Top w10: U1.6 1918.94,1425.17 C22.2@1923.15,1429.37
  Top w20: C22.2 FB1.1
NetC23_2: C23.2 FB2.1 U1.100 | length 125.8
  Top w10: U1.100 2152.68,1288.28 C23.2
  Top w20: FB2.1 C23.2
NetC24_2: C24.2 FB3.1 U1.75 | length 113.7
  Top w10: U1.75 2017.37,685.52 C24.2
  Top w20: C24.2 FB3.1
NetC25_2: C25.2 FB4.1 U1.50 | length 130.8
  Top w10: C25.2 1404.61,815.83 U1.50
  Top w20: FB4.1 C25.2
NetC26_2: C26.2 FB5.1 U1.28 | length 128.5
  Top w10: FB5.1 1398.99,1248.91 U1.28
  Top w20: FB5.1 C26.2
NetC27_2: C27.2 FB6.1 U1.19 | length 119.6
  Top w10: C27.2 1647.93,1432.37 1663.04,1417.26 ; U1.19 1663.04,1417.26 ; FB6.1 1663.04,1417.26
NetC28_2: C28.2 FB7.1 U1.11 | length 127.5
  Top w10: U1.11 1820.52,1398.52 1834,1412 1834,1430.31 FB7.1
  Top w20: FB7.1 C28.2
NetC29_2: C29.2 U1.49 | length 89
  Top w10: C29.2 1412.37,835.52 U1.49
NetC30_2: C30.2 U1.73 | length 67.9
  Top w10: C30.2 1978,683.59 U1.73
NetC31_2: C31.2 C32.2 FB8.1 R15.2 U1.22 | length 311.4
  Top w10: R15.2 1503.46,1414.54 1518,1400 1592,1400 1603.98,1388.02 U1.22
  Top w20: FB8.1@1453.15,1432.37 FB8.1 1501.18,1432.06 R15.2 1503.46,1477.05 C31.2 C32.2
NetC33_1: C33.1 C34.1 R15.1 U1.21 | length 186.2
  Top w10: C33.1 1623.67,1396.85 U1.21
  Top w20: C34.1 1543.15,1434.65 R15.1 1586.18,1434.34 C33.1
NetC35_2: C35.2 R16.1 X1.1 | length 138.1
  Top w20: R16.1 1788,1527.2 X1.1 1803.19,1537 C35.2
NetC36_2: C36.2 SB11.2 X1.2 | length 231.6
  Top w10: C36.2 1684,1519 SB11.2
  Top w20: C36.2 1672,1556.87 X1.2
NetC51_2: C51.2 U2.10 | length 78.3
  Top w10: C51.2 3255,2844.31 3255,2822 3257.84,2819.16 3257.84,2816.56 3259.66,2814.75 3259.66,2796.94 3257.84,2795.12 U2.10
NetJ4_1: J4.1 U1.15
NetJ4_2: J4.2 U1.29
NetJ4_3: J4.3 U1.30
NetJ4_4: J4.4 U1.31
NetR3_1: R3.1 U1.92 | length 171.9
  Top w10: U1.92 2084.5,1131 v1(2124,1131)
  Bottom w10: 1992,1130.8 1992.2,1131 v1(2124,1131)
NetR3_2: R3.2 SB2.1
NetR7_1: R7.1 SB8_Thermocouple_Amplifier1.2 SB8_Thermocouple_Amplifier2.2 SB8_Thermocouple_Amplifier3.2 SB8_Thermocouple_Amplifier4.2 U1.78 | length 1655.1
  Top w10: U1.78 2247.2,855.2 2275.41,827 SB8_Thermocouple_Amplifier1.2 ; 2380,1099 2381.67,1097.33 SB8_Thermocouple_Amplifier2.2 ; 2380,1368 2380.33,1367.67 SB8_Thermocouple_Amplifier3.2 ; 2434,1637 2435,1638 SB8_Thermocouple_Amplifier4.2
  Top w15: 2247.2,855.2 2380,988 2380,1099 2380,1368 2380,1583 2434,1637
NetR7_2: R7.2 SB5.1
NetR16_2: R16.2 U1.12 | length 82.4
  Top w10: R16.2 1788,1420 1800.83,1407.17 U1.12
NetR17_2: R17.2 U1.94 | length 77.9
  Top w10: U1.94 2159.57,1170.17 R17.2
NetR18_2: R18.2 U1.37 | length 60.7
  Top w10: R18.2 1419.74,1071.74 U1.37
NetSB1_1: SB1.1 U1.93 | length 172.1
  Top w10: U1.93 2084.82,1151 v1(2124,1151)
  Bottom w10: 1992,1150.48 1992.52,1151 v1(2124,1151)
NetSB3_1: SB3.1 SB7_Thermocouple_Amplifier1.2 SB7_Thermocouple_Amplifier2.2 SB7_Thermocouple_Amplifier3.2 SB7_Thermocouple_Amplifier4.2 U1.79 | length 1653
  Top w10: U1.79 v2(2231.89,874.89) ; v2@2482.33,997.33 v2(2484,997.33) SB7_Thermocouple_Amplifier2.2 ; v2(2484,727) SB7_Thermocouple_Amplifier1.2 ; v2(2484,1267.67) SB7_Thermocouple_Amplifier3.2 ; v2(2484,1538) SB7_Thermocouple_Amplifier4.2
  Top w15: v2(2231.89,874.89) 2356,999 v2(2356,1267.67) v2(2356,1481)
  Bottom w10: v2(2231.89,874.89) 2379.78,727 v2(2484,727) ; v2@2355.67,997.33 v2(2356,997.33) v2(2484,997.33) ; v2(2356,1481) 2413,1538 v2(2484,1538) ; v2@2356.33,1267.67 v2(2484,1267.67)
NetSB4_1: SB4.1 U1.80
NetSB6_Thermocouple_Amplifier1_1: SB6_Thermocouple_Amplifier1.1 U4_Thermocouple_Amplifier1.6 | length 76.1
  Top w10: SB6_Thermocouple_Amplifier1.1 U4_Thermocouple_Amplifier1.6
NetSB6_Thermocouple_Amplifier2_1: SB6_Thermocouple_Amplifier2.1 U4_Thermocouple_Amplifier2.6 | length 78.1
  Top w10: SB6_Thermocouple_Amplifier2.1 U4_Thermocouple_Amplifier2.6
NetSB6_Thermocouple_Amplifier3_1: SB6_Thermocouple_Amplifier3.1 U4_Thermocouple_Amplifier3.6 | length 76.1
  Top w10: SB6_Thermocouple_Amplifier3.1 U4_Thermocouple_Amplifier3.6
NetSB6_Thermocouple_Amplifier4_1: SB6_Thermocouple_Amplifier4.1 U4_Thermocouple_Amplifier4.6 | length 76.1
  Top w10: SB6_Thermocouple_Amplifier4.1 U4_Thermocouple_Amplifier4.6
NetSB7_Thermocouple_Amplifier1_1: SB7_Thermocouple_Amplifier1.1 U4_Thermocouple_Amplifier1.7 | length 76.1
  Top w10: SB7_Thermocouple_Amplifier1.1 U4_Thermocouple_Amplifier1.7
NetSB7_Thermocouple_Amplifier2_1: SB7_Thermocouple_Amplifier2.1 U4_Thermocouple_Amplifier2.7 | length 78.1
  Top w10: SB7_Thermocouple_Amplifier2.1 U4_Thermocouple_Amplifier2.7
NetSB7_Thermocouple_Amplifier3_1: SB7_Thermocouple_Amplifier3.1 U4_Thermocouple_Amplifier3.7 | length 76.1
  Top w10: SB7_Thermocouple_Amplifier3.1 U4_Thermocouple_Amplifier3.7
NetSB7_Thermocouple_Amplifier4_1: SB7_Thermocouple_Amplifier4.1 U4_Thermocouple_Amplifier4.7 | length 76.1
  Top w10: SB7_Thermocouple_Amplifier4.1 U4_Thermocouple_Amplifier4.7
NetSB8_Thermocouple_Amplifier1_1: SB8_Thermocouple_Amplifier1.1 U4_Thermocouple_Amplifier1.5 | length 76.1
  Top w10: SB8_Thermocouple_Amplifier1.1 U4_Thermocouple_Amplifier1.5
NetSB8_Thermocouple_Amplifier2_1: SB8_Thermocouple_Amplifier2.1 U4_Thermocouple_Amplifier2.5 | length 78.1
  Top w10: SB8_Thermocouple_Amplifier2.1 U4_Thermocouple_Amplifier2.5
NetSB8_Thermocouple_Amplifier3_1: SB8_Thermocouple_Amplifier3.1 U4_Thermocouple_Amplifier3.5 | length 76.1
  Top w10: SB8_Thermocouple_Amplifier3.1 U4_Thermocouple_Amplifier3.5
NetSB8_Thermocouple_Amplifier4_1: SB8_Thermocouple_Amplifier4.1 U4_Thermocouple_Amplifier4.5 | length 76.1
  Top w10: SB8_Thermocouple_Amplifier4.1 U4_Thermocouple_Amplifier4.5
NetSB11_1: SB11.1 U1.13 | length 83.4
  Top w10: SB11.1 1781.15,1390.36 U1.13
NetU1_70: U1.70 U8.4 | length 0.1
  Top w10: U1.70 U1.70@1919,748.96
NetU1_71: U1.71 U8.1 | length 1.9
  Top w10: U1.71 U1.71@1940,750.28
SCK: J2.3 J2.6 J2.9 J2.12 R4.2 SB5.2
SCL: J3.2 J3.4 J3.6 J3.8 R2.1 SB2.2 | length 1009
  Bottom w50: J3.2 573,2348 627,2402 748,2402 791,2359 ; J3.4 791,2359 ; J3.6 1009,2357 ; J3.8 1227,2363 1188,2402 1053,2402 1009,2358 1009,2357 ; 791,2359 834,2402 964,2402 1009,2357
SDA: J3.1 J3.3 J3.5 J3.7 R1.1 SB1.2 | length 1014.6
  Top w50: J3.1 464,2352 518,2406 633,2406 682,2357 ; J3.3 682,2357 ; J3.5 900,2364 ; J3.7 1118,2361 1076,2403 939,2403 900,2364 ; 682,2357 727,2402 862,2402 900,2364
SS1: J2.25 U1.85
SS2: J2.22 U1.86
SS3: J2.19 U1.87
SS4: J2.16 U1.88
T+1: J6.9 U4_Thermocouple_Amplifier1.3 | length 546.9
  Top w15: U4_Thermocouple_Amplifier1.3 2897,777 2932,812 2932,892 3061,1021 J6.9
T+2: J6.8 U4_Thermocouple_Amplifier2.3 | length 431.7
  Top w15: U4_Thermocouple_Amplifier2.3 2940.33,1047.33 3024,1131 J6.8
T+3: J6.7 U4_Thermocouple_Amplifier3.3 | length 430.7
  Top w15: U4_Thermocouple_Amplifier3.3 2892.33,1317.67 2969,1241 J6.7
T+4: J6.6 U4_Thermocouple_Amplifier4.3 | length 560.4
  Top w15: U4_Thermocouple_Amplifier4.3 2917,1588 3023,1482 3023,1374 3046,1351 J6.6
T-1: J6.1 U4_Thermocouple_Amplifier1.2 | length 430.7
  Top w15: U4_Thermocouple_Amplifier1.2 2893,727 2966,800 2966,875 3059,968 J6.1
T-2: J6.2 U4_Thermocouple_Amplifier2.2 | length 318
  Top w15: U4_Thermocouple_Amplifier2.2 2941.33,997.33 3021,1077 J6.2
T-3: J6.3 U4_Thermocouple_Amplifier3.2 | length 322.4
  Top w15: U4_Thermocouple_Amplifier3.2 2904.33,1267.67 2988,1184 3102,1184 J6.3
T-4: J6.4 U4_Thermocouple_Amplifier4.2 | length 451.5
  Top w15: U4_Thermocouple_Amplifier4.2 2926,1538 2994,1470 2994,1361 3060,1295 J6.4
T_JTCK: J8.2 U1.76
T_JTMS: J8.3 U1.72
TC_CS1: SB6_Thermocouple_Amplifier1.2 U1.81 | length 487.9
  Top w10: U1.81 v2(2144,914.26) ; v2(2484,777) SB6_Thermocouple_Amplifier1.2
  Bottom w10: v2(2144,914.26) 2228.74,914.26 2366,777 v2(2484,777)
TC_CS2: SB6_Thermocouple_Amplifier2.2 U1.82 | length 481
  Top w10: U1.82 U1.82@2085.35,935 ; U1.82@2085.35,933.94 v2(2171,933.94) ; v2@2482,1048 2484,1048 2484.67,1047.33 SB6_Thermocouple_Amplifier2.2
  Bottom w10: v2(2171,933.94) 2226.94,933.94 2341,1048 v2@2484,1048
  other v2: 2484,1047.33
TC_CS3: SB6_Thermocouple_Amplifier3.2 U1.83 | length 660.5
  Top w10: v2(2484,1317.67) SB6_Thermocouple_Amplifier3.2
  Bottom w10: v2(2138,953.63) 2217.63,953.63 2288,1024 2288,1250 2355.67,1317.67 v2(2484,1317.67)
TC_CS4: SB6_Thermocouple_Amplifier4.2 U1.84 | length 925.9
  Top w10: U1.84 v2(2171,973) ; v2(2484,1588) SB6_Thermocouple_Amplifier4.2
  Bottom w10: v2(2171,973) 2210,973 2268,1031 2268,1441 2415,1588 v2(2484,1588)
VSW: C51.1 L1.1 U2.1 U2.12 U2.13 U2.16 | length 183
  Top w10: U2.16 3191.9,2658.9 U2.1 ; U2.13 3191.9,2771.1 U2.12 3215.66,2773.92 3215.66,2844.34 C51.1
pads on no net: J2.SHIELD J4.5 J4.6 J4.7 J4.8 J4.9 J6.5 J7.2 J8.1 J9.1 J9.3 J9.4 J9.5 J9.6 J9.8 J9.9 U1.1 U1.2 U1.3 U1.4 U1.5 U1.7 U1.8 U1.9 U1.14 U1.16 U1.17 U1.18 U1.23 U1.24 U1.25 U1.26 U1.32 U1.33 U1.34 U1.35 U1.36 U1.47 U1.48 U1.51 U1.52 U1.66 U1.67 U1.68 U1.69 U1.77 U1.89 U1.90 U1.91 U1.95 U2.6 U2.7 U2.8 U2.9 U4_Thermocouple_Amplifier1.8 U4_Thermocouple_Amplifier2.8 U4_Thermocouple_Amplifier3.8 U4_Thermocouple_Amplifier4.8 U8.5 U8.8 X1.None
copper on no net: | length 44.5
  Top w10: v1(1437.28,1288.28) 1478,1288.28 ; 1544.93,1355.2 1546,1354.13 ; 1720.5,1353.61 1722.09,1355.2

## Polygon pours and split planes (outlines as drawn)
GND on GND (split plane): 3399.9,40.1 40.1,40.1 40.1,3169.9 3399.9,3169.9
3V3 on 3V3 (split plane): 3399.9,40.1 40.1,40.1 40.1,3169.9 3399.9,3169.9

## Other copper
Top:
  rectangle net 3V3: 2391,2713 2535,2903
  rectangle net 5V: 2659,2740 2936,2814
  rectangle net VSW: 3103,2655 3191.9,2685.47
  rectangle net VSW: 3107,2742 3191.9,2771.1
  rectangle net 12V: 3237,2622 3257,2672
  rectangle net GND: 3179,2702 3233,2729

## Silkscreen, mask and mechanical layers (free items; w line width, h text height)
Top Overlay:
  text "GND" at 2175,725 h40 r90
  text "SWDIO" at 2275,725 h40 r90
  text "SWCLK" at 2375,725 h40 r90

## Dimensions
20,20 to 3420,20 on Mechanical 11
20,20 to 20,3190 on Mechanical 11

## Text inside footprints (layer, text, board x,y; h text height)
J1: Top Overlay "1" at 1659,405 h40; Top Overlay "25" at 1669,145 h40
J2: Top Overlay "1" at 4475,417 h40 r90; Top Overlay "25" at 4735,427 h40 r90
J3: Top Overlay "15" at 505,2120 h20; Top Overlay "9" at 1165,2120 h20; Top Overlay "8" at 1220,2340 h20; Top Overlay "1" at 460,2340 h20; Bottom Overlay "15" at 535,2120 h20; Bottom Overlay "9" at 1180,2120 h20; Bottom Overlay "8" at 1235,2340 h20
J4: Top Overlay "9" at 4611,3387 h20 r270; Top Overlay "6" at 4616,3062 h20 r270; Top Overlay "5" at 4831,3007 h20 r270; Top Overlay "1" at 4831,3442 h20 r270; Bottom Overlay "6" at 4616,3047 h20 r270; Bottom Overlay "5" at 4831,2992 h20 r270; Bottom Overlay "1" at 4831,3437 h20 r270; Bottom Overlay "9" at 4611,3372 h20 r270
J6: Top Overlay "9" at 3280,1016 h20 r90; Top Overlay "6" at 3275,1341 h20 r90; Top Overlay "5" at 3060,1396 h20 r90; Top Overlay "1" at 3060,961 h20 r90; Bottom Overlay "6" at 3275,1356 h20 r90; Bottom Overlay "5" at 3060,1411 h20 r90; Bottom Overlay "1" at 3060,966 h20 r90; Bottom Overlay "9" at 3280,1031 h20 r90
J9: Top Overlay "9" at 513,174.33 h20; Top Overlay "6" at 838,179.33 h20; Top Overlay "5" at 893,394.33 h20; Top Overlay "1" at 458,394.33 h20; Bottom Overlay "6" at 853,179.33 h20; Bottom Overlay "5" at 908,394.33 h20; Bottom Overlay "1" at 463,394.33 h20; Bottom Overlay "9" at 528,174.33 h20